# Altium PCB PCMCIA Type 2 Un-Shielded 9 Pin IO Connector.PCBDOC
Units mil, origin at the board's own origin, x right, y up, seen from the top; angles counter-clockwise.
Board outline 2898 x 1787 mil, 10 copper layers (TopLayer, MidLayer1, MidLayer2, MidLayer3, MidLayer4, MidLayer5, MidLayer6, MidLayer7, MidLayer8, BottomLayer); 2 components, 0 nets, 82 pads, 0 vias.
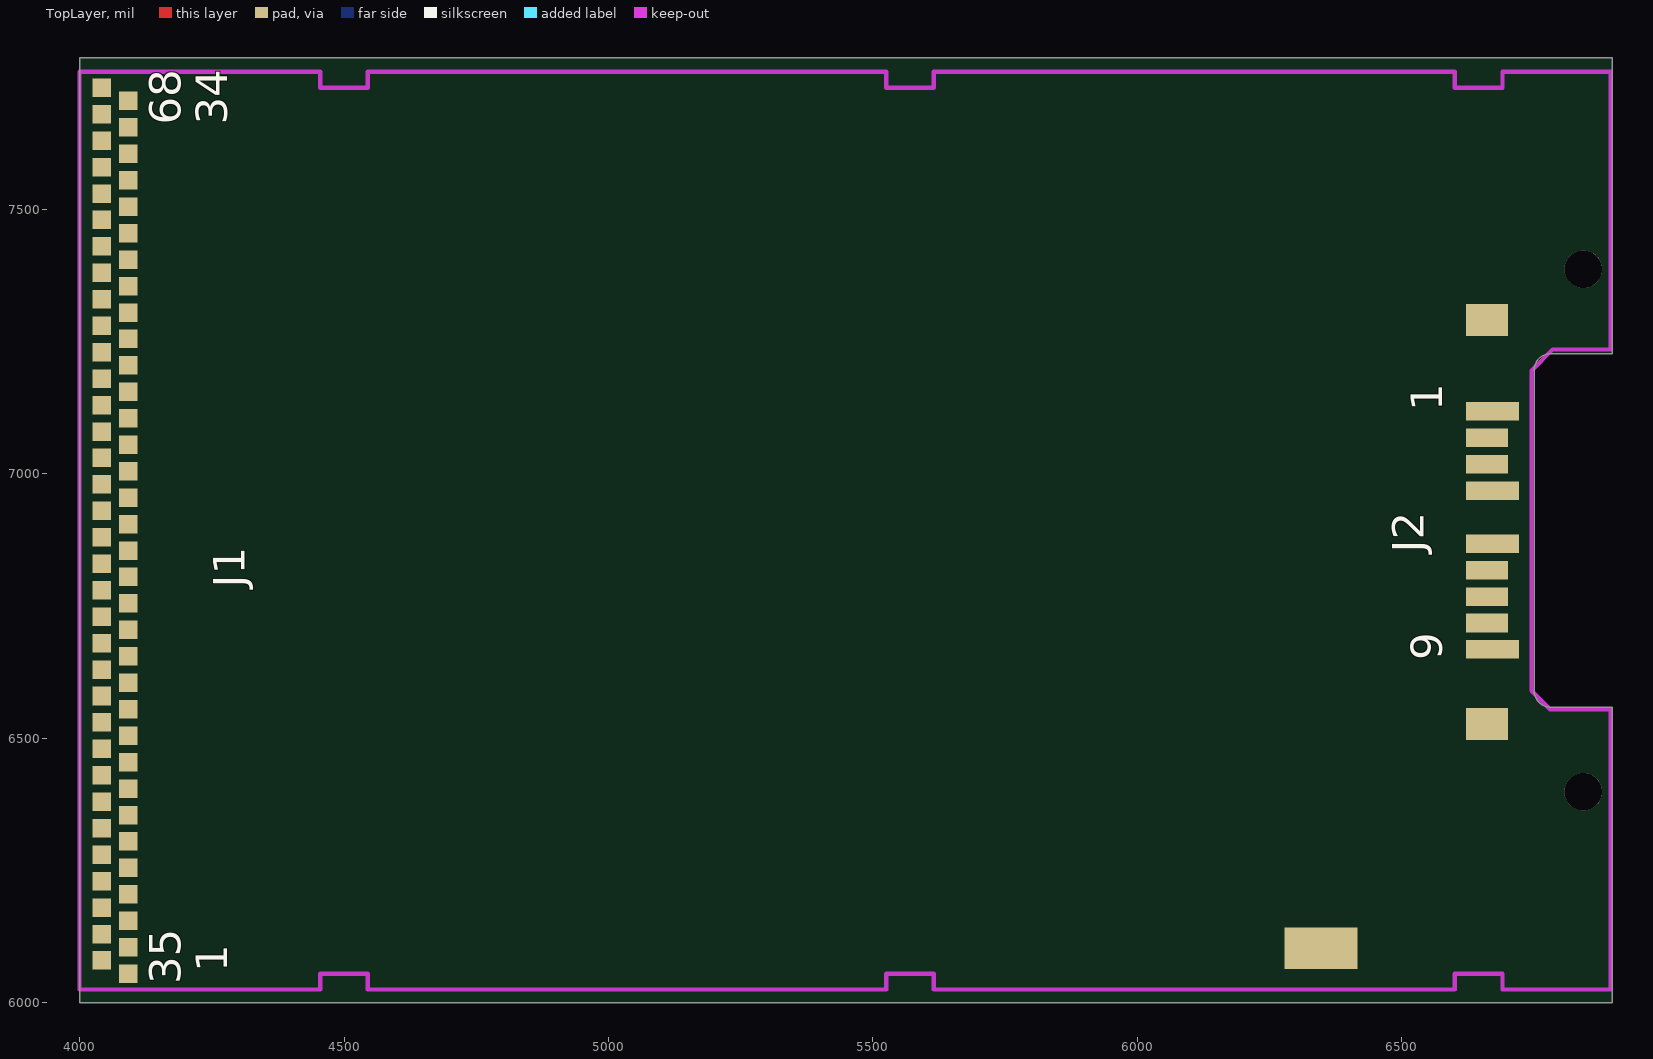
[diagram p0: TopLayer view]
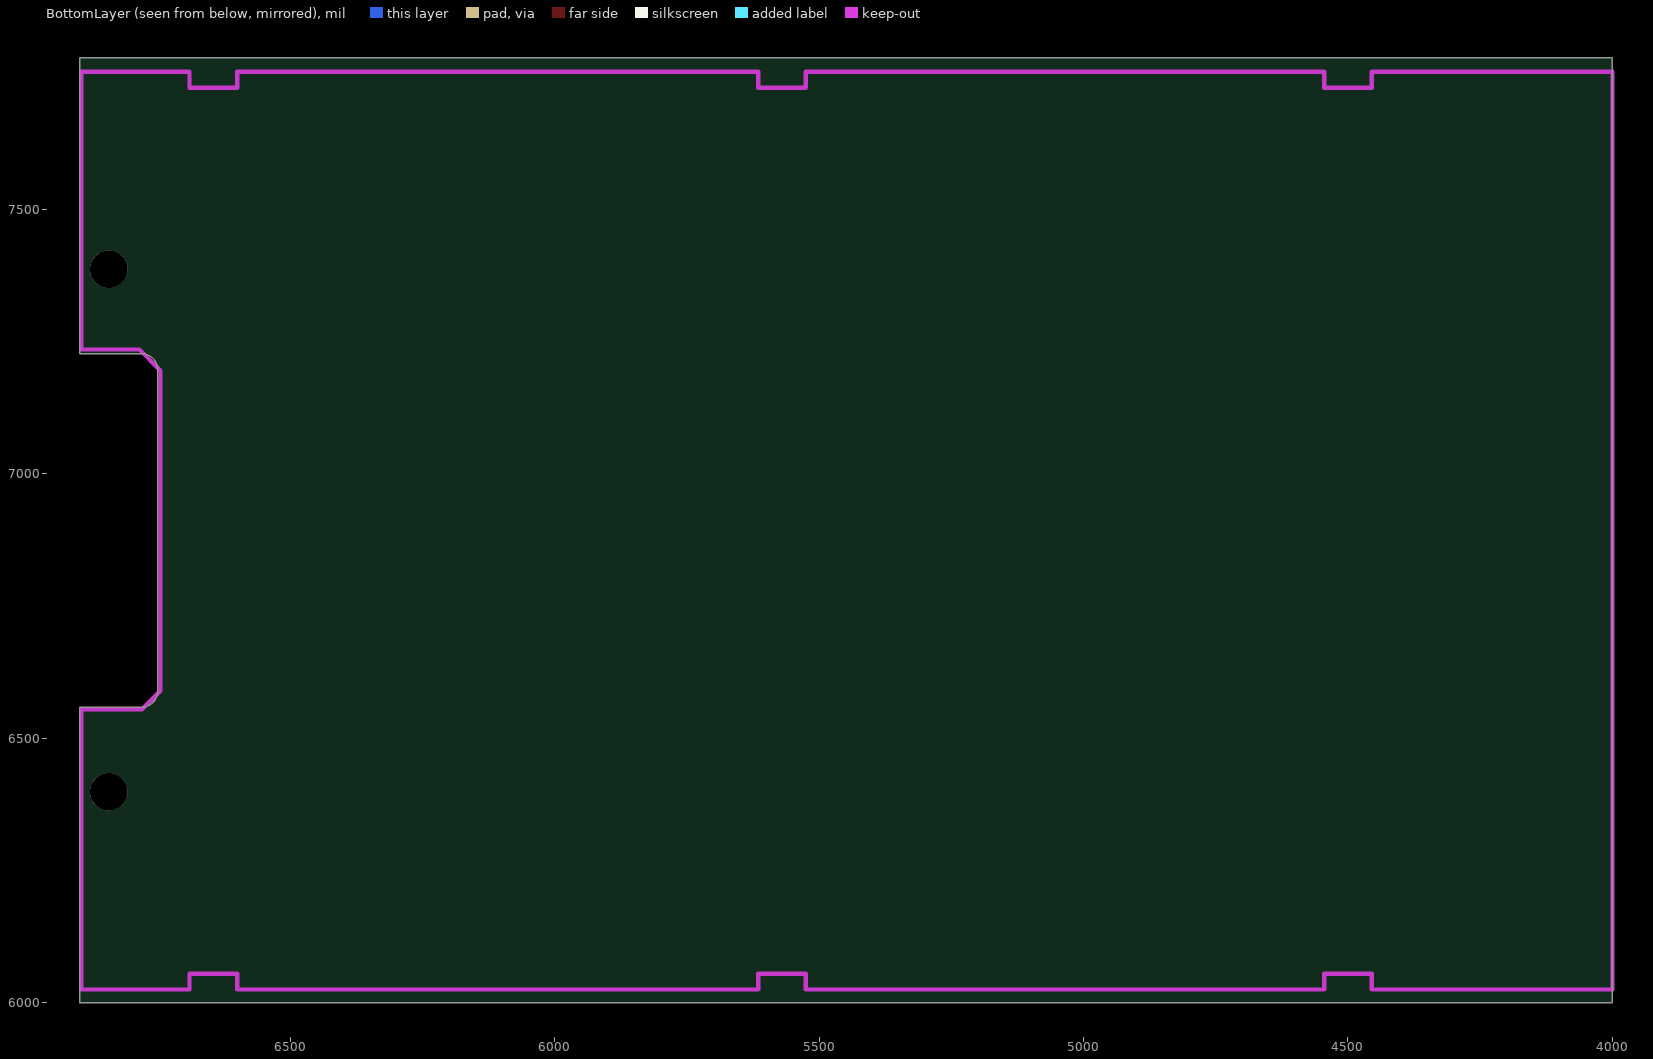
[diagram p1: BottomLayer view, seen from below]
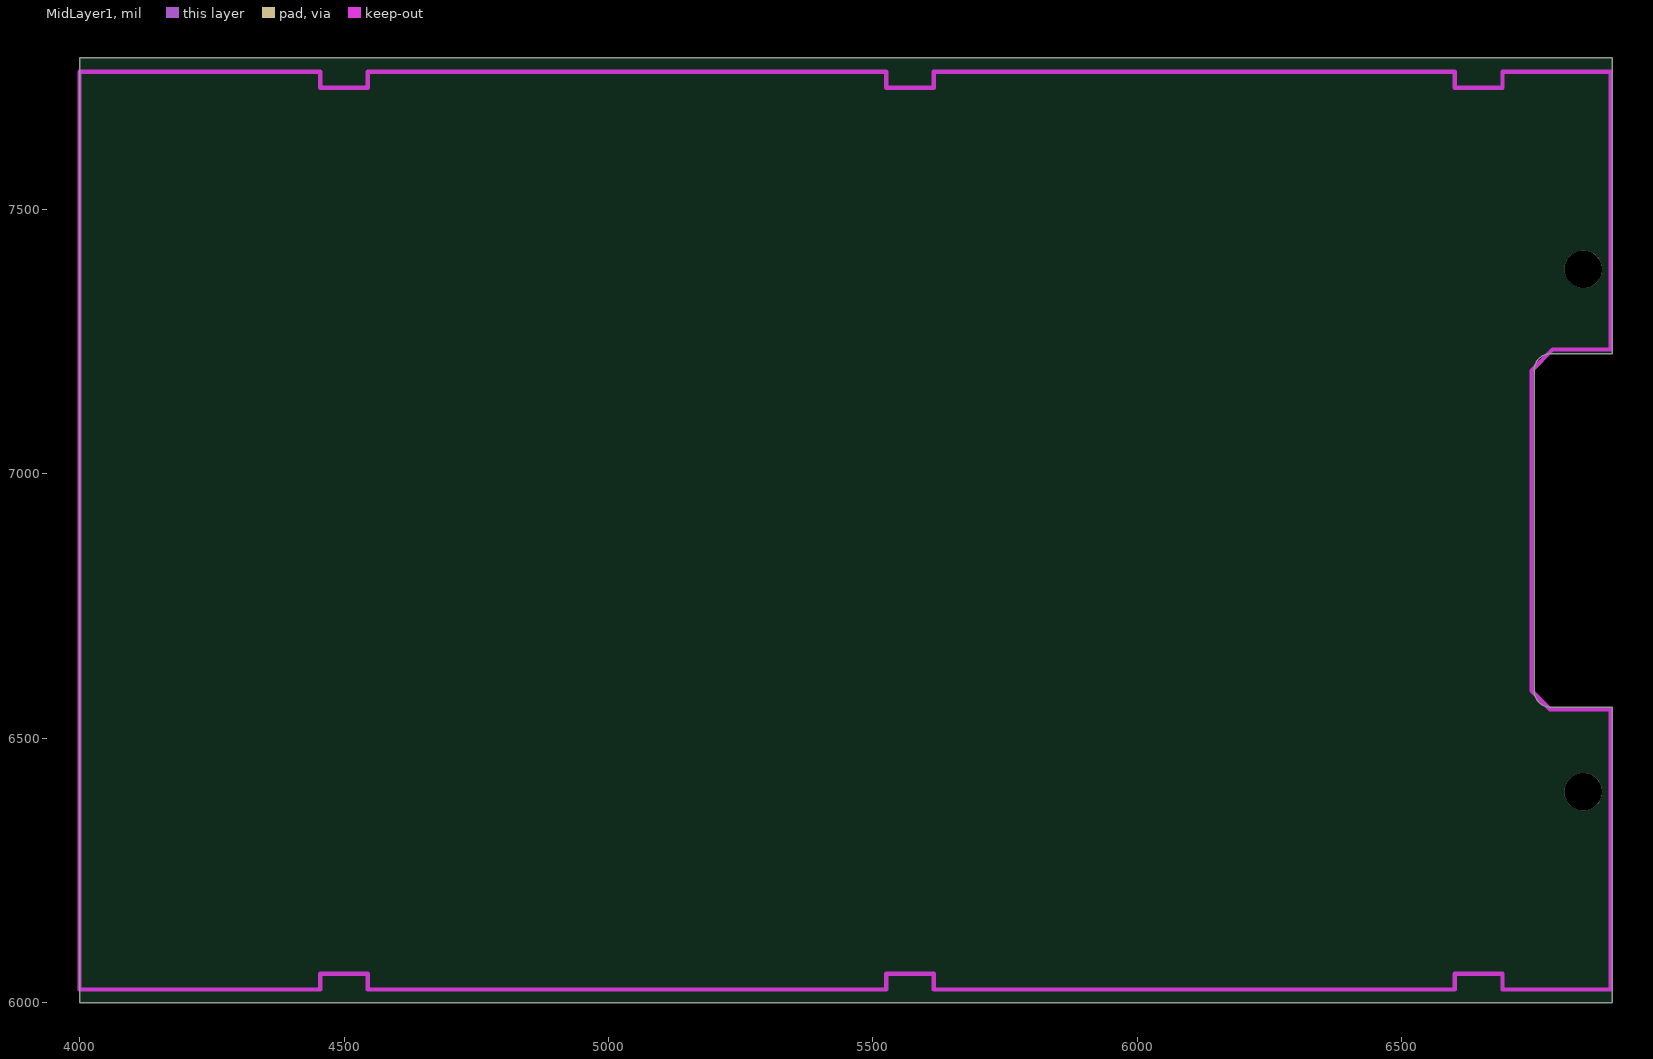
[diagram p2: MidLayer1]
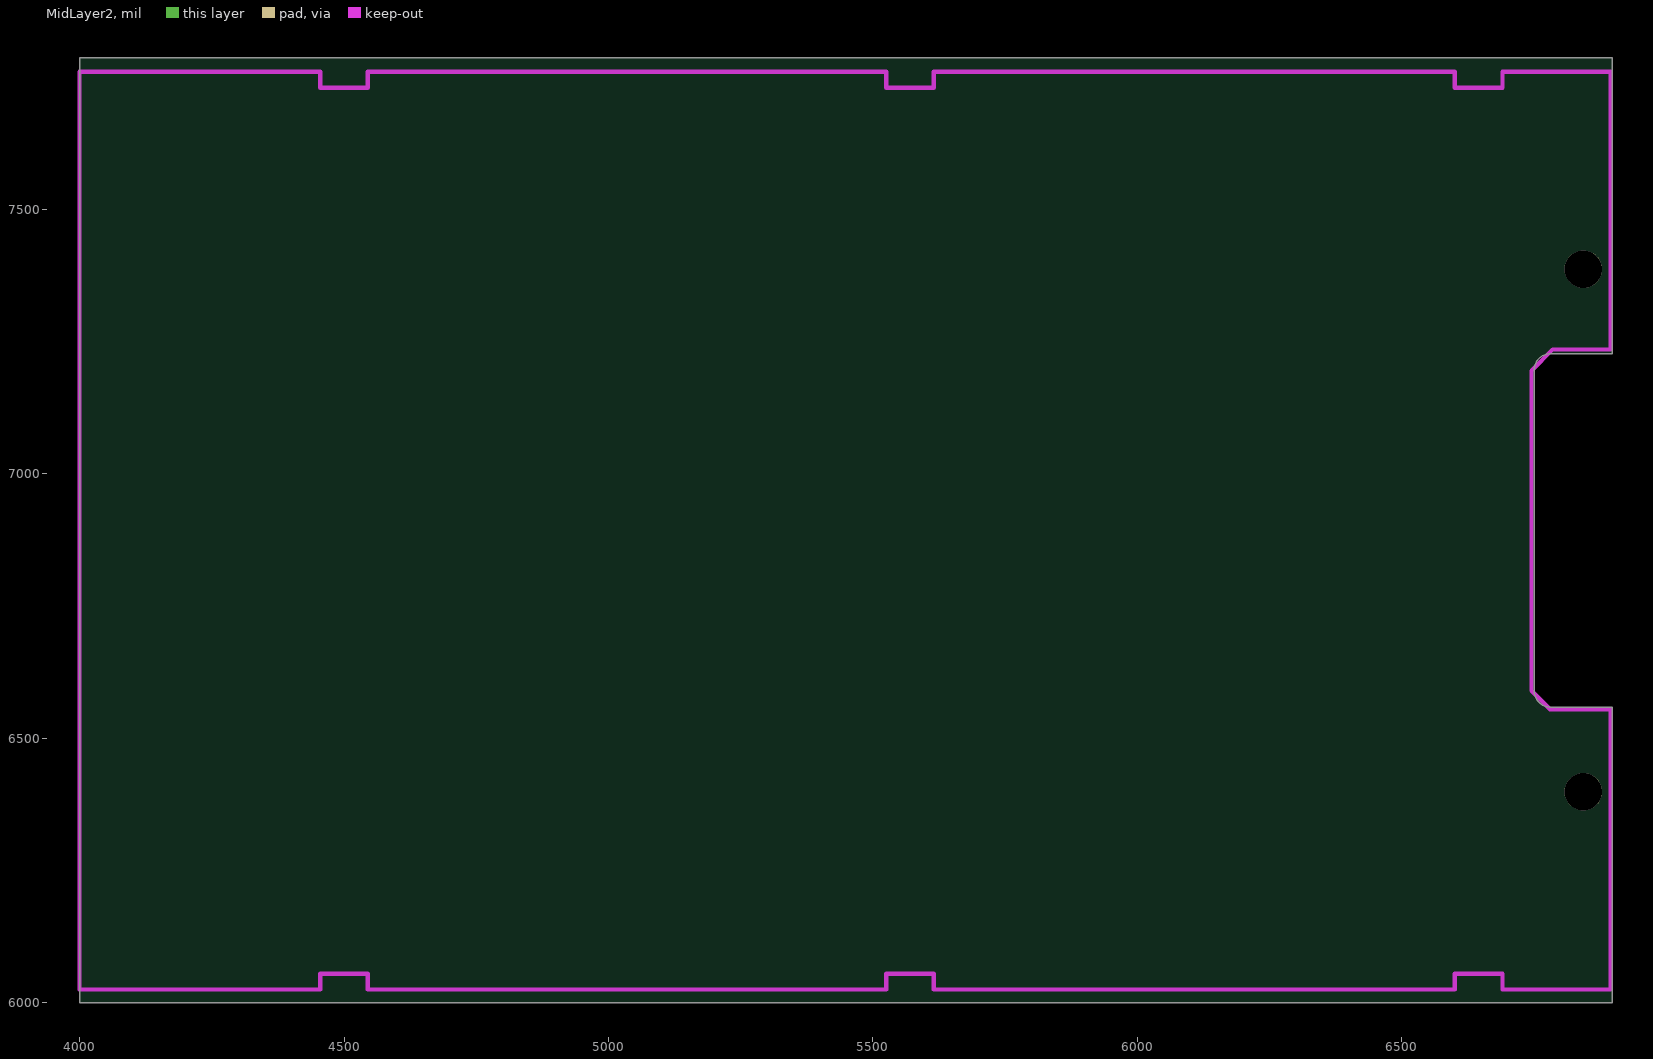
[diagram p3: MidLayer2]
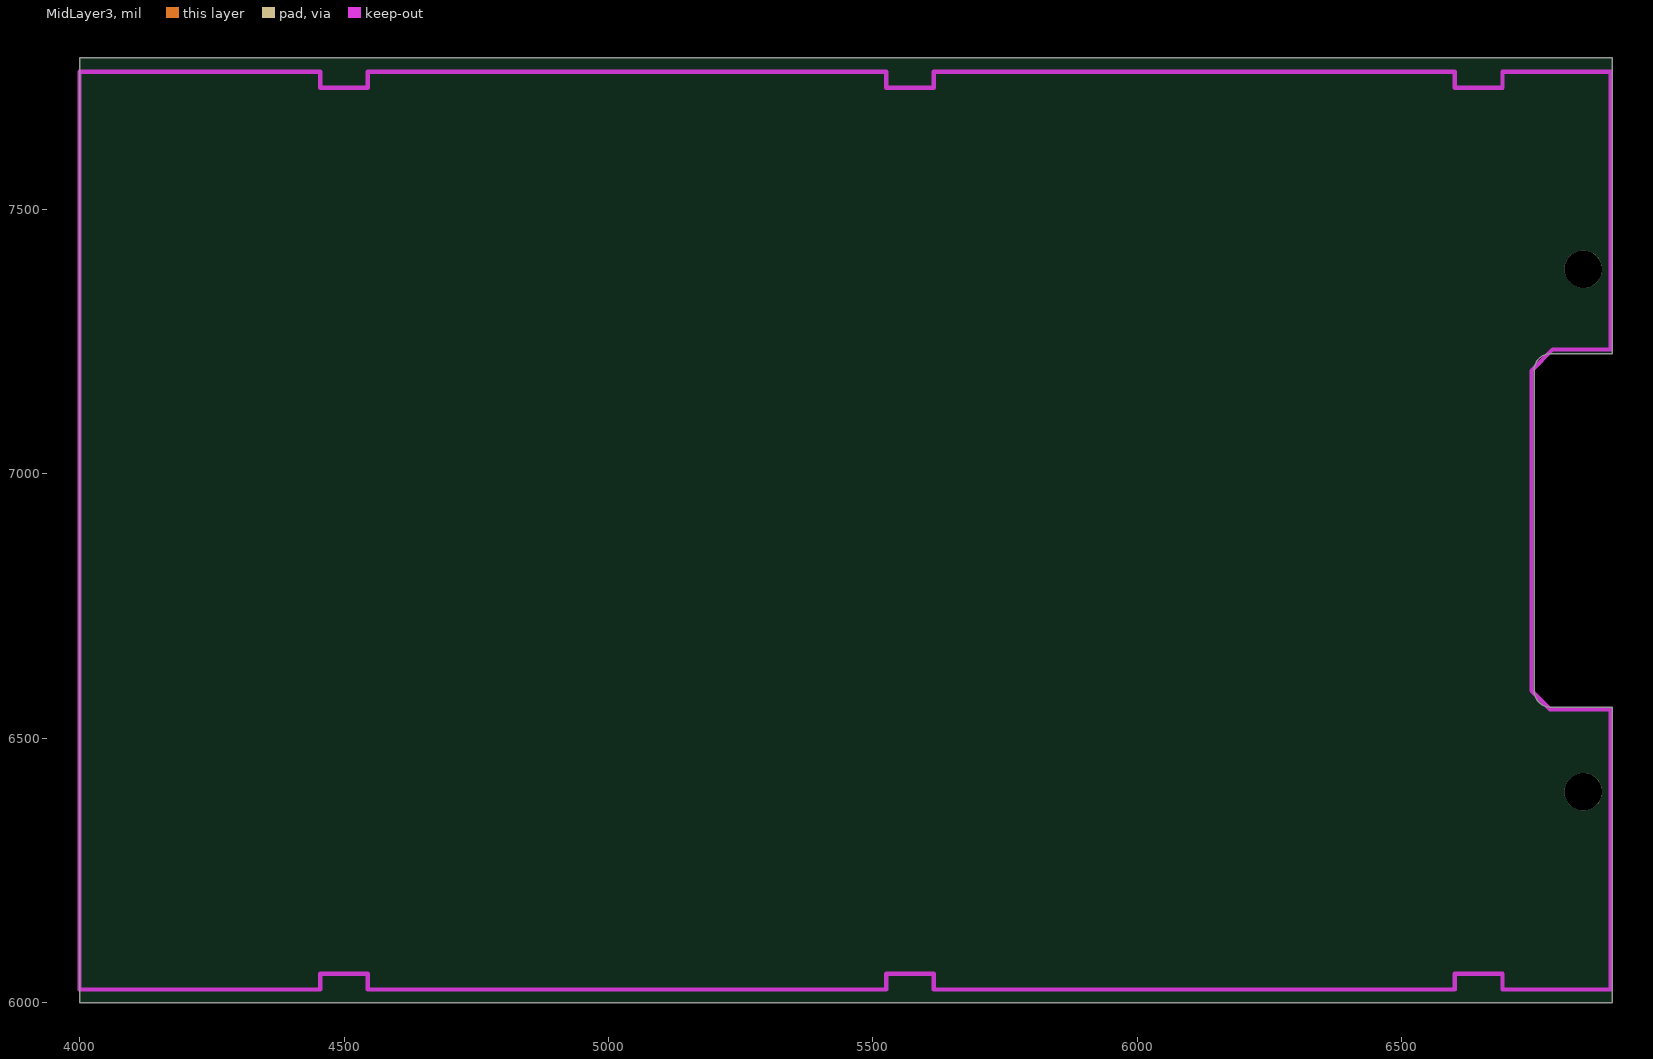
[diagram p4: MidLayer3]
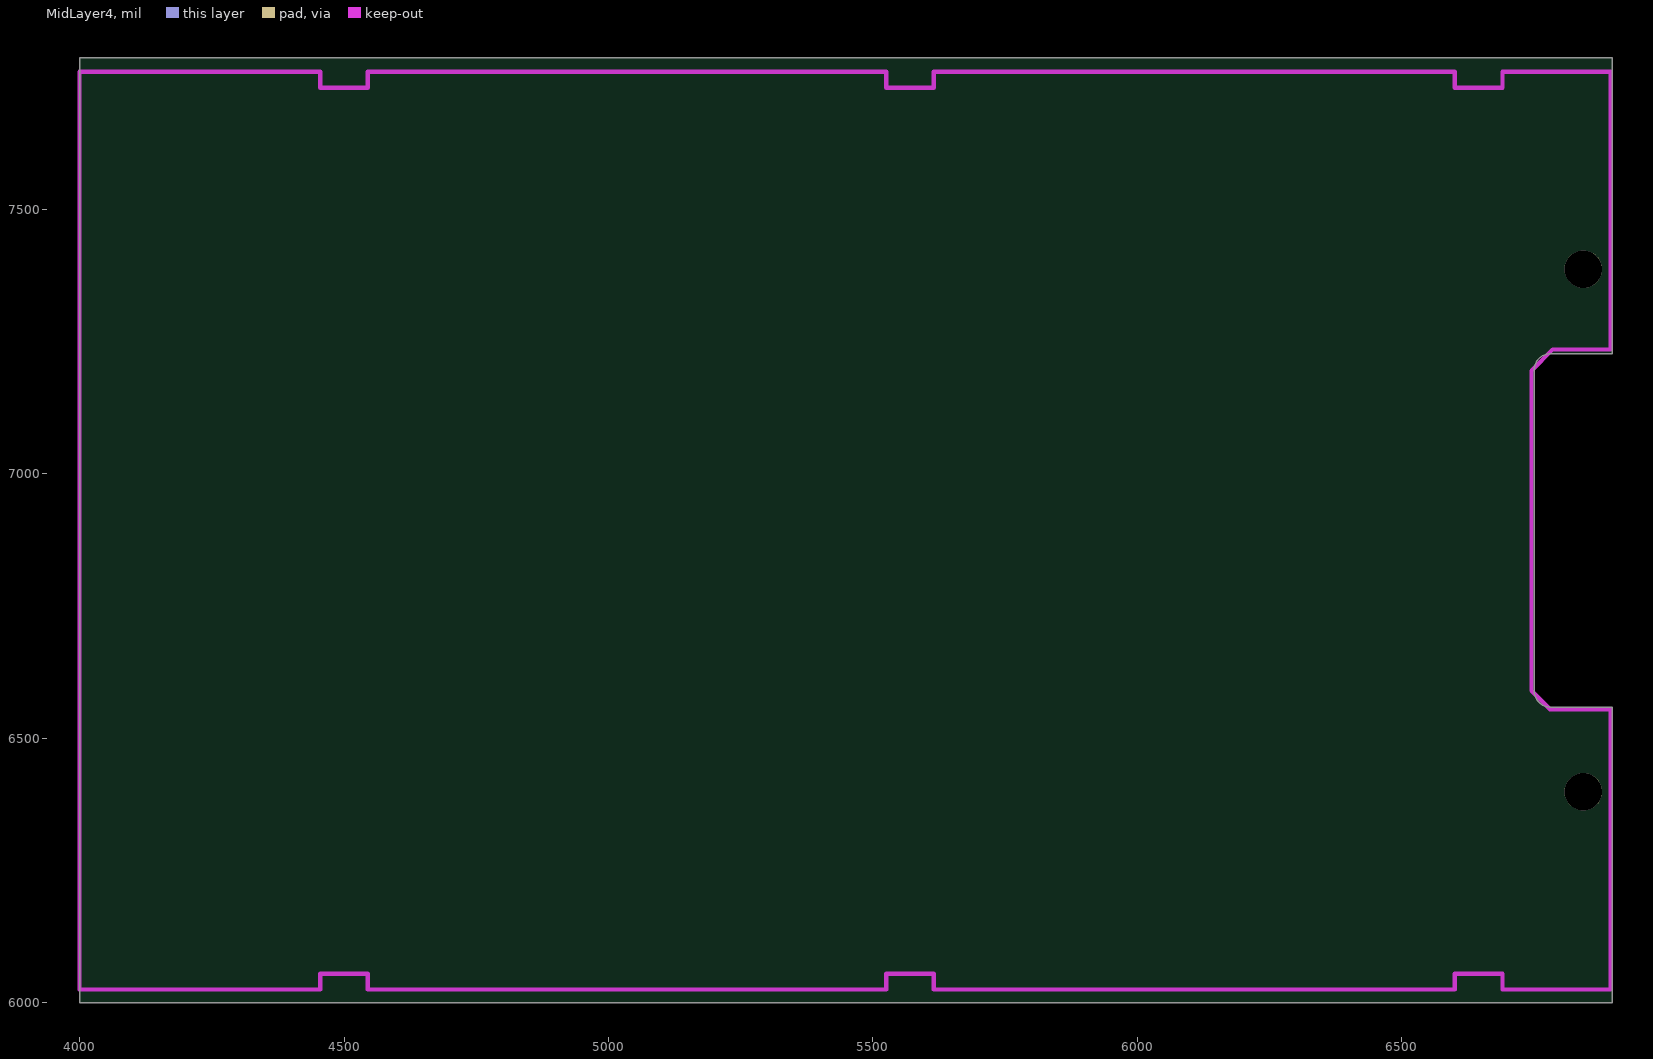
[diagram p5: MidLayer4]
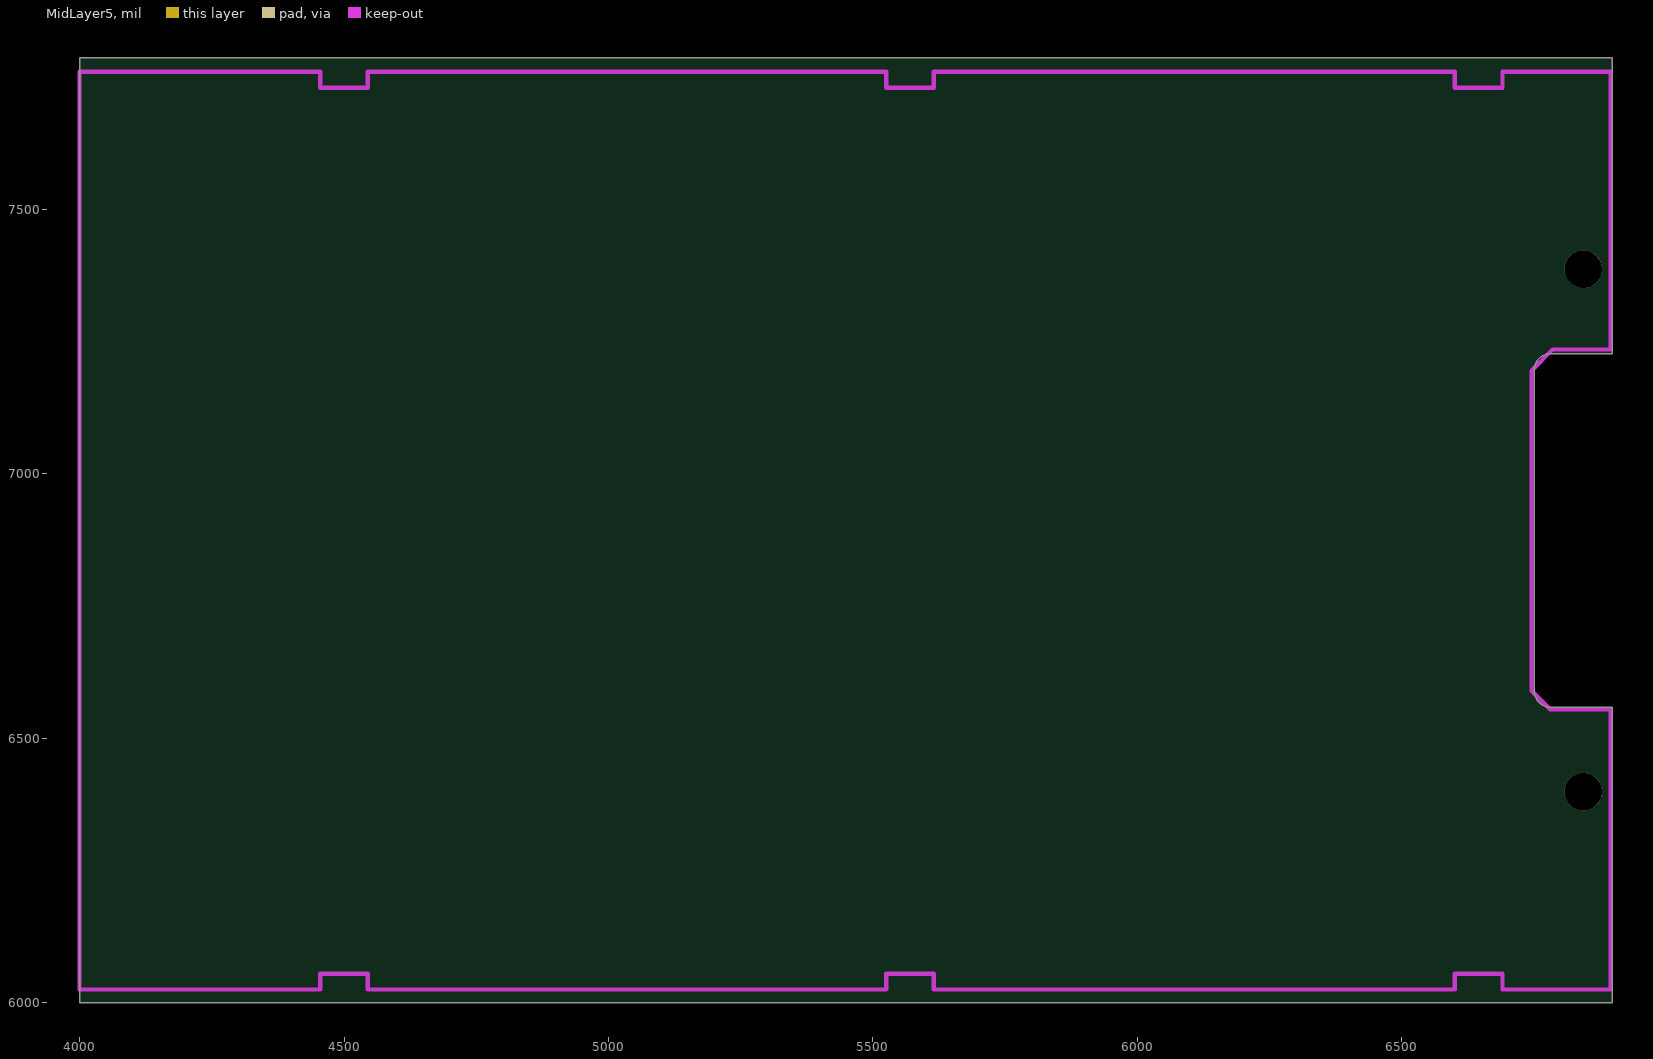
[diagram p6: MidLayer5]
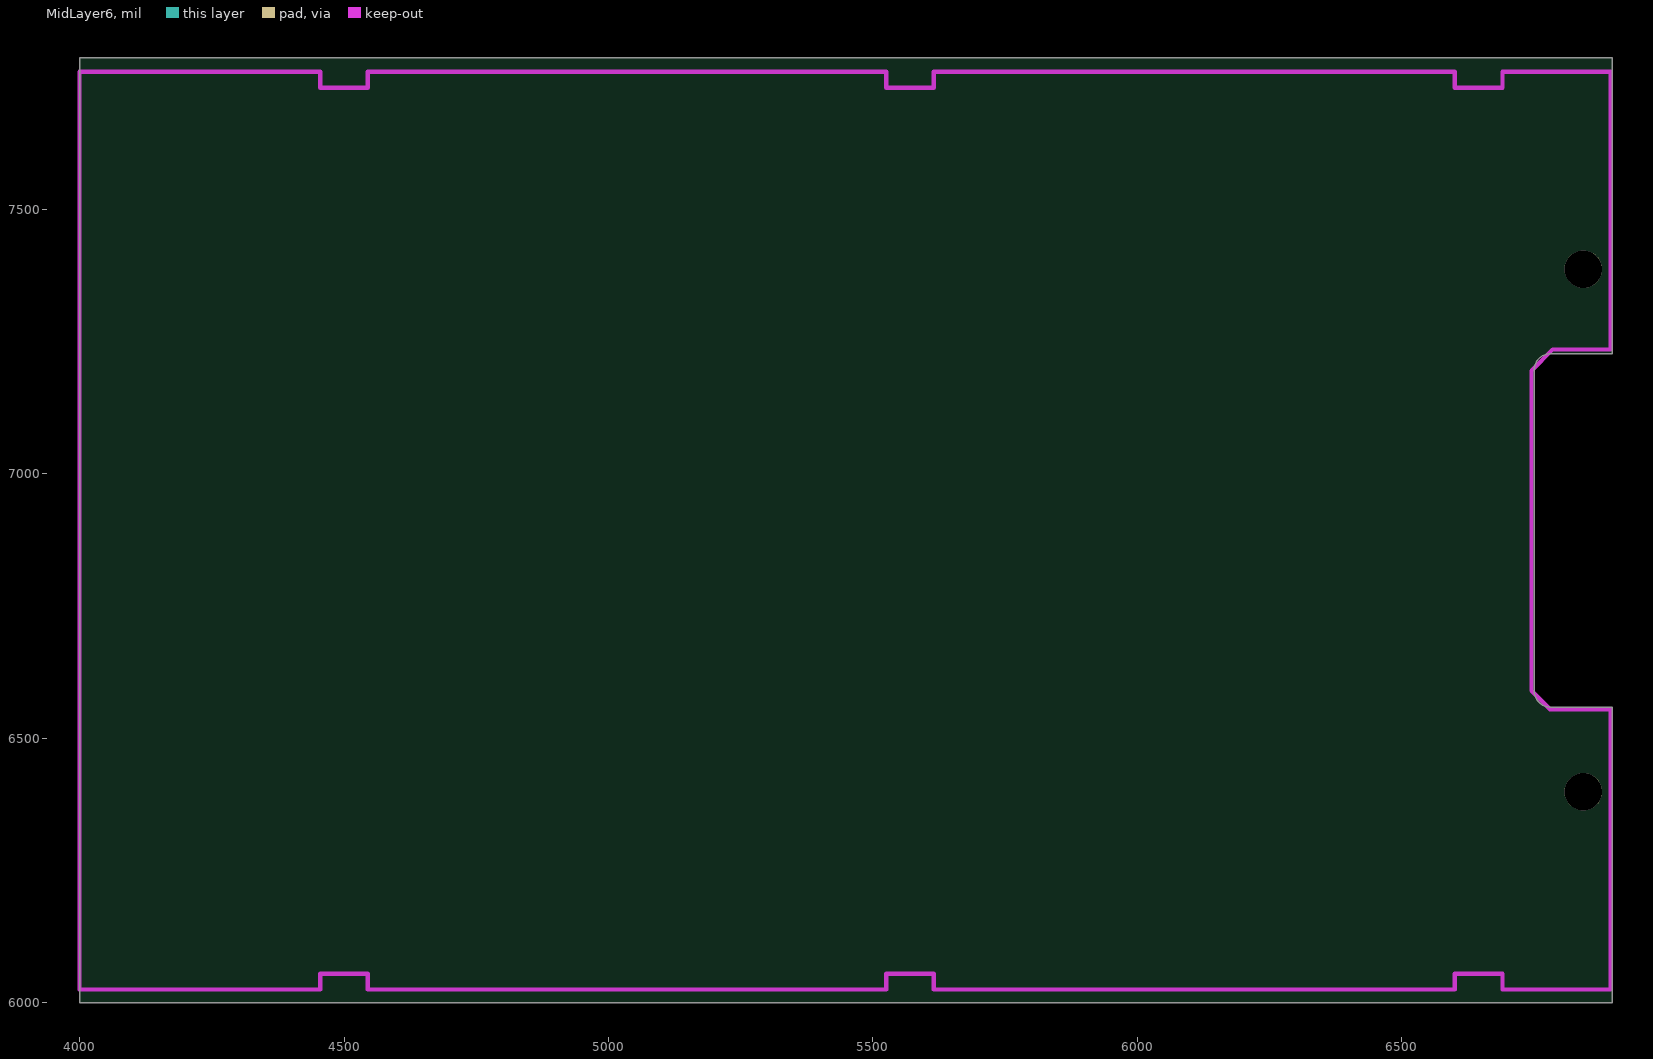
[diagram p7: MidLayer6]
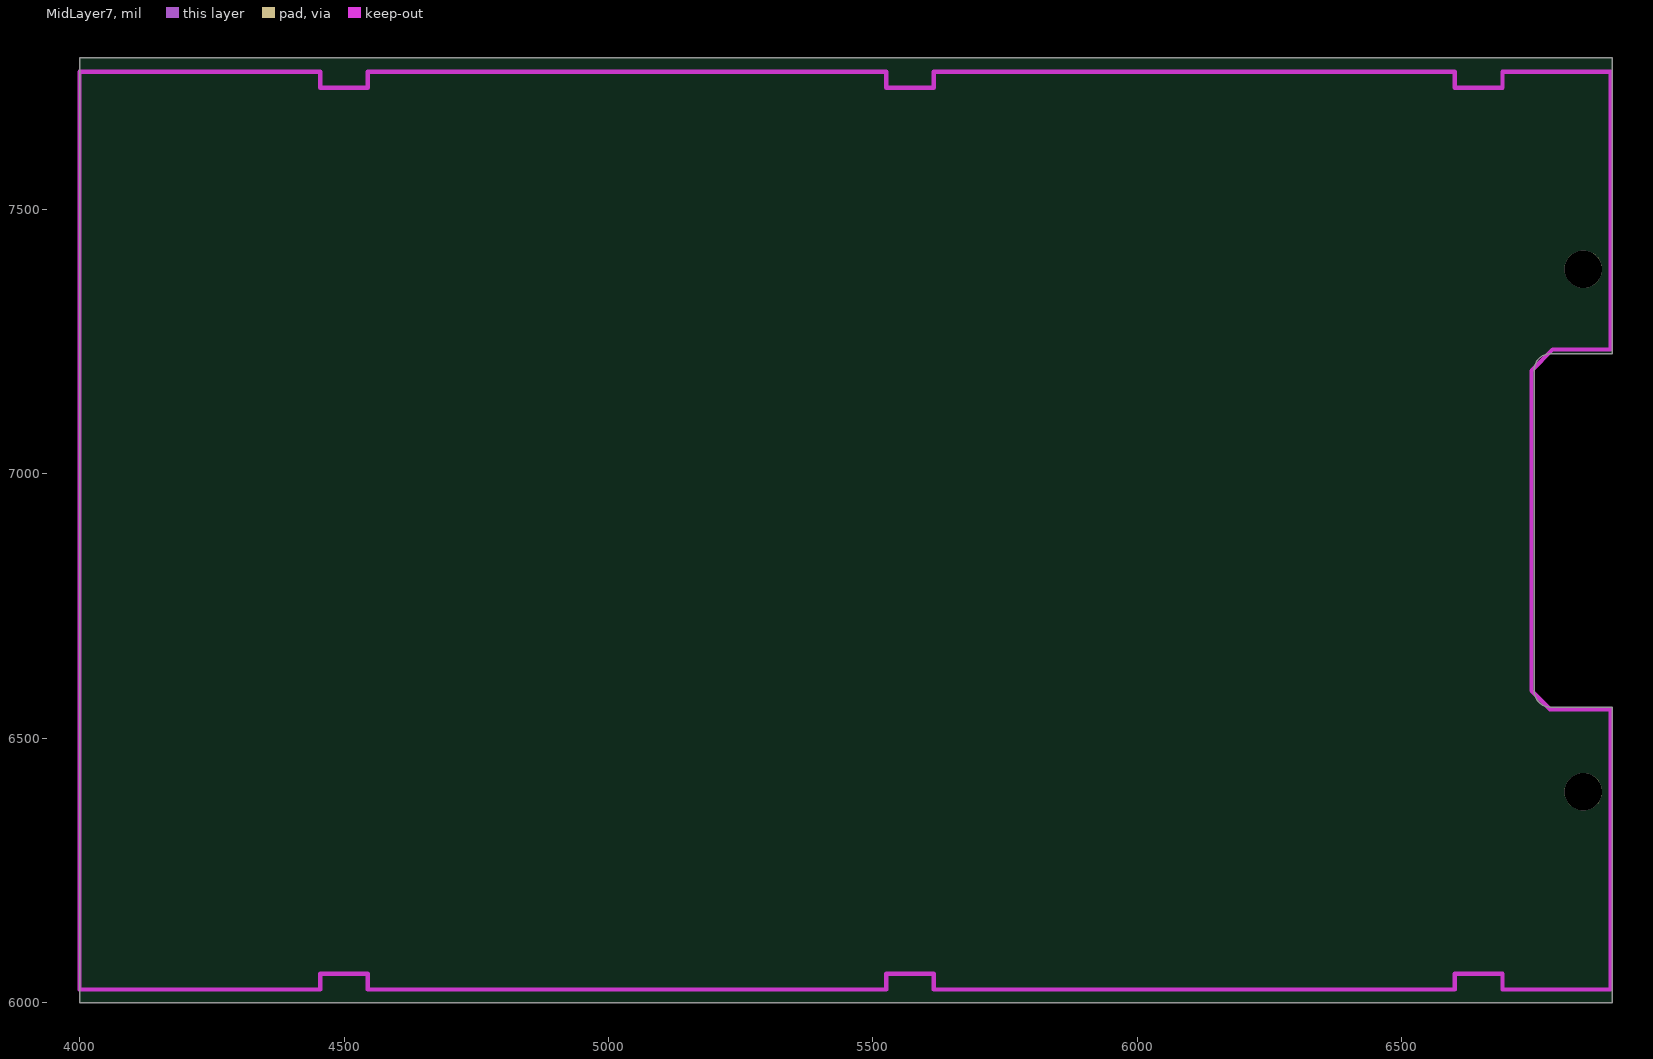
[diagram p8: MidLayer7]
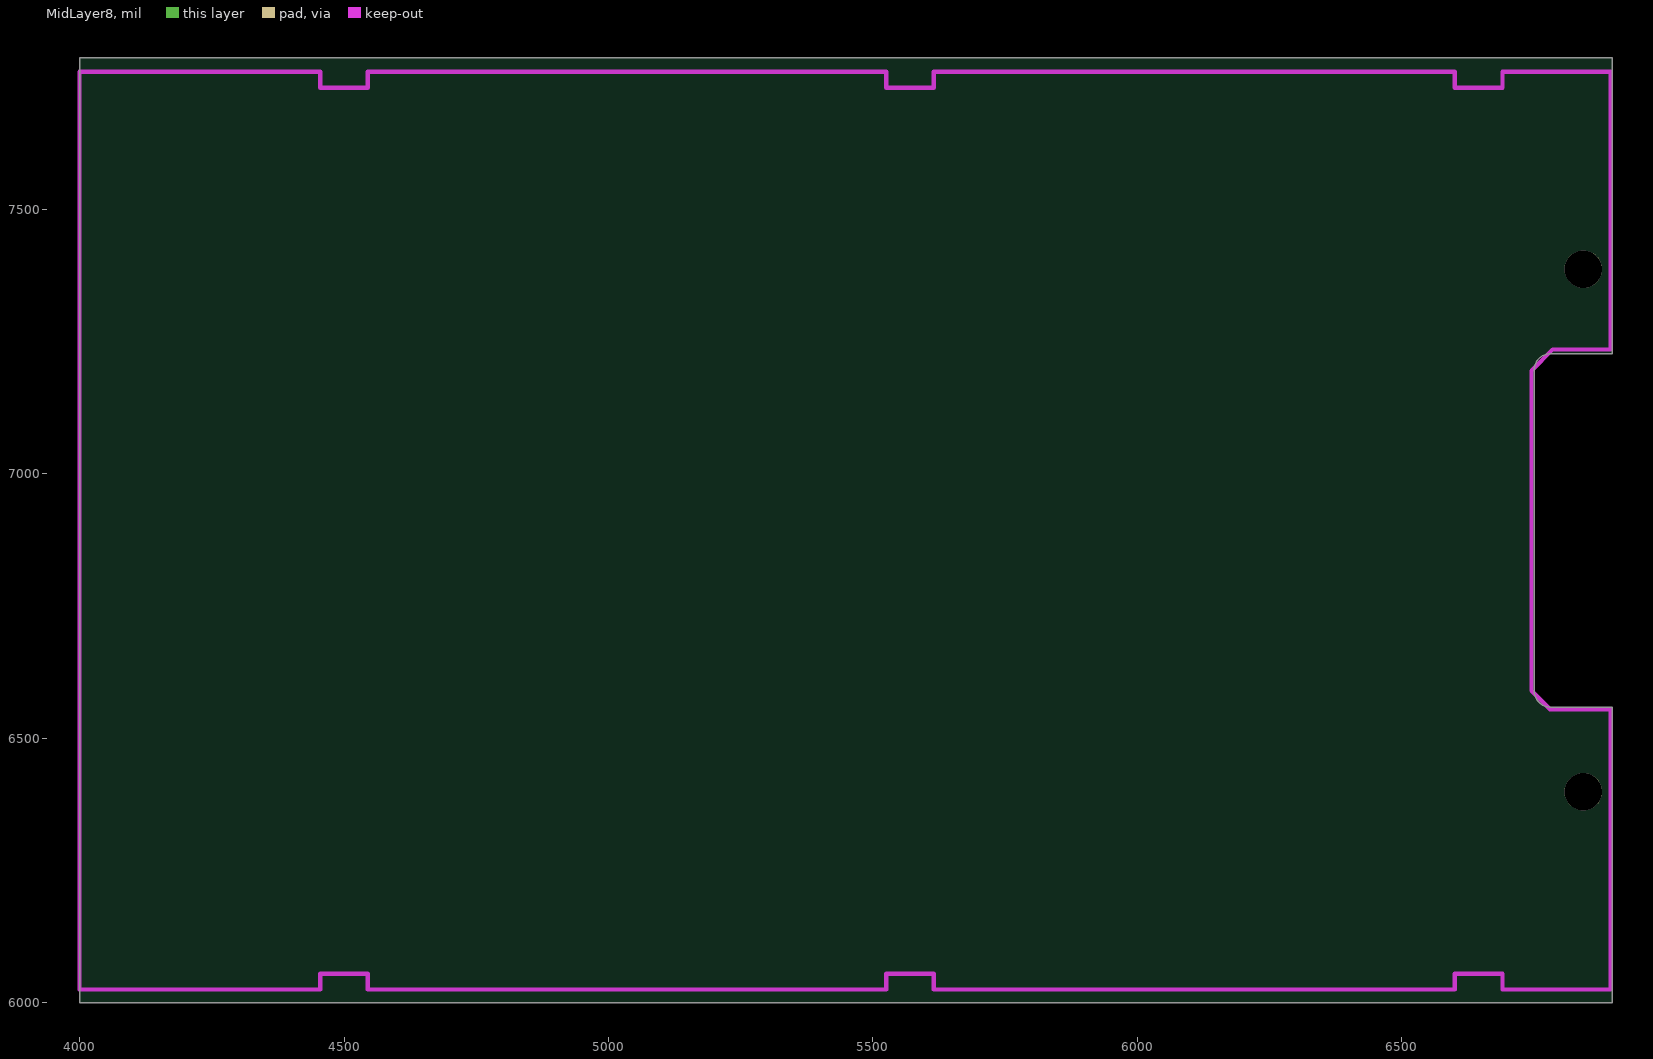
[diagram p9: MidLayer8]

## Layer stack, top to bottom
TopSolder: solder mask 0.4, Solder Resist, Dk 3.5
TopLayer: signal copper 1.4
Dielectric1: core 12.6, FR-4, Dk 4.8
MidLayer1: signal copper 1.4
Dielectric2: prepreg 12.6, FR-4, Dk 4.8
MidLayer2: signal copper 1.4
Dielectric3: core 12.6, FR-4, Dk 4.8
MidLayer3: signal copper 1.4
Dielectric4: prepreg 12.6, FR-4, Dk 4.8
MidLayer4: signal copper 1.4
Dielectric5: core 12.6, FR-4, Dk 4.8
MidLayer5: signal copper 1.4
Dielectric6: prepreg 12.6, FR-4, Dk 4.8
MidLayer6: signal copper 1.4
Dielectric7: core 12.6, FR-4, Dk 4.8
MidLayer7: signal copper 1.4
Dielectric8: prepreg 12.6, FR-4, Dk 4.8
MidLayer8: signal copper 1.4
Dielectric9: core 12.6, FR-4, Dk 4.8
BottomLayer: signal copper 1.4
BottomSolder: solder mask 0.4, Solder Resist, Dk 3.5

## Board outline
4000,6000 6898,6000 6898,6559 6781,6559 cw(c6781,6590) 6750,6590 6750,7196 cw(c6781,7196) 6781,7227 6898,7227 6898,7787 4000,7787

## Design rules (kind name [scope] priority, off if disabled: settings)
Clearance [All] p1: gap=10
FabricationTestPointUsage TestPointUsage [All] p1: valid=0 allowmultiple=FALSE
FabricationTestpoint Testpoint [All] p1: side=3 testpointundercomponent=TRUE minsize=40 maxsize=100 preferedsize=60 minholesize=20 maxholesize=40 preferedholesize=32 testpointgrid=1 allowsidetop=TRUE allowsidebottom=TRUE usegrid=TRUE gridtolerance=0.01
PlaneClearance [All] p1: clearance=0
PolygonConnect [All] p1: connectstyle=Relief reliefconductorwidth=10 reliefentries=4 polygonreliefangle="90 Angle" airgapwidth=10
RoutingVias [All] p1: holewidth=28 width=50 viastyle="Through Hole" minholewidth=28 minwidth=50 maxholewidth=28 maxwidth=50
SilkToSolderMaskClearance SilkscreenOverComponentPads [IsPad] p1: minsilkscreentomaskgap=10 clearancetoexposedcopper=TRUE
SolderMaskExpansion SolderMaskExpansion_1 [HasPad('J2-M1')] p1: expansion=0
SolderMaskExpansion [HasPad('J2-M2')] p2: expansion=0
SolderMaskExpansion SolderMaskExpansion_2 [HasPad('Free-1')] p3: expansion=0
SolderMaskExpansion SolderMaskExpansion_3 [All] p4: expansion=2
Width [All] p1: maxlimit=10 minlimit=10 preferedwidth=10
26 further rules are at their usual default settings.

## Components (designator, comment, footprint, x,y, rotation, side; value= is the part's Value field where it differs from the comment)
J1 "" PCMCIA68-4 4092,6055 r90 top locked
J2 "" PCMCIAI-9 6671,7118 r90 top locked

## Footprints (in the part's own frame and the unit in brackets; to place one, negate y for a bottom-side part, rotate by r counter-clockwise, add the part's x,y. Pads: shape width x height; smd on the part's side, far side on the other; paste and mask are expansions set on the pad)
PCMCIA68-4 [mil]
  rect 35x35 smd: 1(0,0) 2(50,0) 3(100,0) 4(150,0) 5(200,0) 6(250,0) 7(300,0) 8(350,0) 9(400,0) 10(450,0) 11(500,0) 12(550,0) 13(600,0) 14(650,0) 15(700,0) 16(750,0) 17(800,0) 18(850,0) 19(900,0) 20(950,0) 21(1000,0) 22(1050,0) 23(1100,0) 24(1150,0) 25(1200,0) 26(1250,0) 27(1300,0) 28(1350,0) 29(1400,0) 30(1450,0) 31(1500,0) 32(1550,0) 33(1600,0) 34(1650,0) 35(25,50) 36(75,50) 37(125,50) 38(175,50) 39(225,50) 40(275,50) 41(325,50) 42(375,50) 43(425,50) 44(475,50) 45(525,50) 46(575,50) 47(625,50) 48(675,50) 49(725,50) 50(775,50) 51(825,50) 52(875,50) 53(925,50) 54(975,50) 55(1025,50) 56(1075,50) 57(1125,50) 58(1175,50) 59(1225,50) 60(1275,50) 61(1325,50) 62(1375,50) 63(1425,50) 64(1475,50) 65(1525,50) 66(1575,50) 67(1625,50) 68(1675,50)
PCMCIAI-9 [mil]
  rect 35x100 smd: 1(0,0) 4(-150,0) 5(-250,0) 9(-450,0)
  rect 35x79 smd: 2(-50,10) 3(-100,10) 6(-300,10) 7(-350,10) 8(-400,10)
  rect 60x79 smd: G1(173,10) G2(-591,10)
  round 71 hole 71: M1(269,-172) M2(-719,-172)

## Free pads (board coordinates)
  rect 138x79 smd: 1(6347,6103)

## Nets (pads, with @x,y where several pads share a name; then routed paths per layer and width w, separated by ;. In a path a pad name is that pad's centre, name@x,y a point inside that pad or via, vN(x,y) a via of type N, cw(c..) or ccw(c..) an arc to the next point about the centre after c; other vN are vias at no path point)
pads on no net: J1.1 J1.2 J1.3 J1.4 J1.5 J1.6 J1.7 J1.8 J1.9 J1.10 J1.11 J1.12 J1.13 J1.14 J1.15 J1.16 J1.17 J1.18 J1.19 J1.20 J1.21 J1.22 J1.23 J1.24 J1.25 J1.26 J1.27 J1.28 J1.29 J1.30 J1.31 J1.32 J1.33 J1.34 J1.35 J1.36 J1.37 J1.38 J1.39 J1.40 J1.41 J1.42 J1.43 J1.44 J1.45 J1.46 J1.47 J1.48 J1.49 J1.50 J1.51 J1.52 J1.53 J1.54 J1.55 J1.56 J1.57 J1.58 J1.59 J1.60 J1.61 J1.62 J1.63 J1.64 J1.65 J1.66 J1.67 J1.68 J2.1 J2.2 J2.3 J2.4 J2.5 J2.6 J2.7 J2.8 J2.9 J2.G1 J2.G2 J2.M1 J2.M2

## Keep-outs
KeepOutLayer:
  lines w8: 4000,6025 4000,7760 4455,7760 4455,7730 4545,7730 4545,7760 5525,7760 5525,7730 5615,7730 5615,7760 6600,7760 6600,7730 6690,7730 6690,7735 6690,7760 6895,7760 6895,7235 6785,7235 6745,7195 6745,6590 6780,6555 6895,6555 6895,6025 6690,6025 6690,6055 6600,6055 6600,6025 5615,6025 5615,6055 5525,6055 5525,6025 4545,6025 4545,6055 4455,6055 4455,6025 4000,6025

## Other copper
TopLayer:
  text ".GTL" at 6600,7890 h90
MidLayer1:
  text ".G1" at 6600,7890 h90
MidLayer2:
  text ".G2" at 6600,7890 h90
MidLayer3:
  text ".G3" at 6600,7890 h90
MidLayer4:
  text ".G4" at 6600,7890 h90
MidLayer5:
  text ".G5" at 6600,7890 h90
MidLayer6:
  text ".G6" at 6600,7890 h90
MidLayer7:
  text ".G7" at 6600,7890 h90
MidLayer8:
  text ".G8" at 6600,7890 h90
BottomLayer:
  text "P/N XXXXXX-XXX REV A" at 5320,8250 h75
  text ".GBL" at 6600,7890 h90

## Silkscreen, mask and mechanical layers (free items; w line width, h text height)
TopOverlay:
  rectangle: 4281,8743 5031,8943
  rectangle: 4281,8453 5031,8653
  lines w10: 5392.59,8845.97 ccw(c5441,8885.5) 5392.71,8845.83
  text "C" at 5496,8848 h60
  text "2002 COMPANY NAME" at 5646,8848 h75
  text "S/N" at 4031,8800.5 h75
  text "BOARD NAME" at 5496,8673 h75
  text "ASSY NO.: XXXXXX" at 5496,8523 h75
  text "REV" at 4031,8503 h75
  text ".GTO" at 6600,7890 h90
TopPaste:
  text ".GTP" at 6600,7890 h90
BottomPaste:
  text ".GBP" at 6600,7890 h90
TopSolder:
  text ".GTS" at 6600,7890 h90
BottomSolder:
  text ".GBS" at 6600,7890 h90
Mechanical1:
  lines w8: 4000,6000 4000,7787 4155,7787 4235,7787 6898,7787 6898,7227 6781,7227 ccw(c6781,7196) 6750,7196 6750,6590 ccw(c6781,6590) 6781,6559 6898,6559 6898,6000 4235,6000 4155,6000 4000,6000
Mechanical4:
  text ".Pcb_File_Name_No_Path" at 4700,8080 h90
  text ".Printout_Name" at 4700,7890 h90
  text "NOTE:" at 7100,6260 h50
  text "68 Pin Conn. : AMP 146229-1 or 146322-1" at 7100,6190 h50
  text "15 Pin Conn. : AMP 557908-1" at 7100,6110 h50
  text "Frame : AMP 557920-1, -5, -3" at 7100,6035 h50
DrillDrawing:
  text ".LEGEND" at 7133,6990 h90
  text "Drilling Details." at 7133,6790 h90

## Dimensions
4000,6000 to 6750,5985 on Mechanical4
4000,6000 to 3986,6399 on Mechanical4

## Text inside footprints (layer, text, board x,y; h text height)
J1: TopOverlay "34" at 4279,7660 h60 r90; TopOverlay "68" at 4191.5,7660 h60 r90; TopOverlay "1" at 4279,6057.5 h60 r90; TopOverlay "35" at 4191.5,6035 h60 r90
J2: TopOverlay "9" at 6576,6648 h60 r90; TopOverlay "1" at 6576,7118 h60 r90